# Altium PCB PCB_Source_IoT.PcbDoc (part 1 of 2)
Units mil, origin at the board's own origin, x right, y up, seen from the top; angles counter-clockwise.
Board outline 6000 x 4000 mil, 2 copper layers (Top Layer, Bottom Layer), stack 61.855 mil thick; 59 components, 29 nets, 125 pads, 0 vias.
Unrouted connection lines stored in the file: 95.
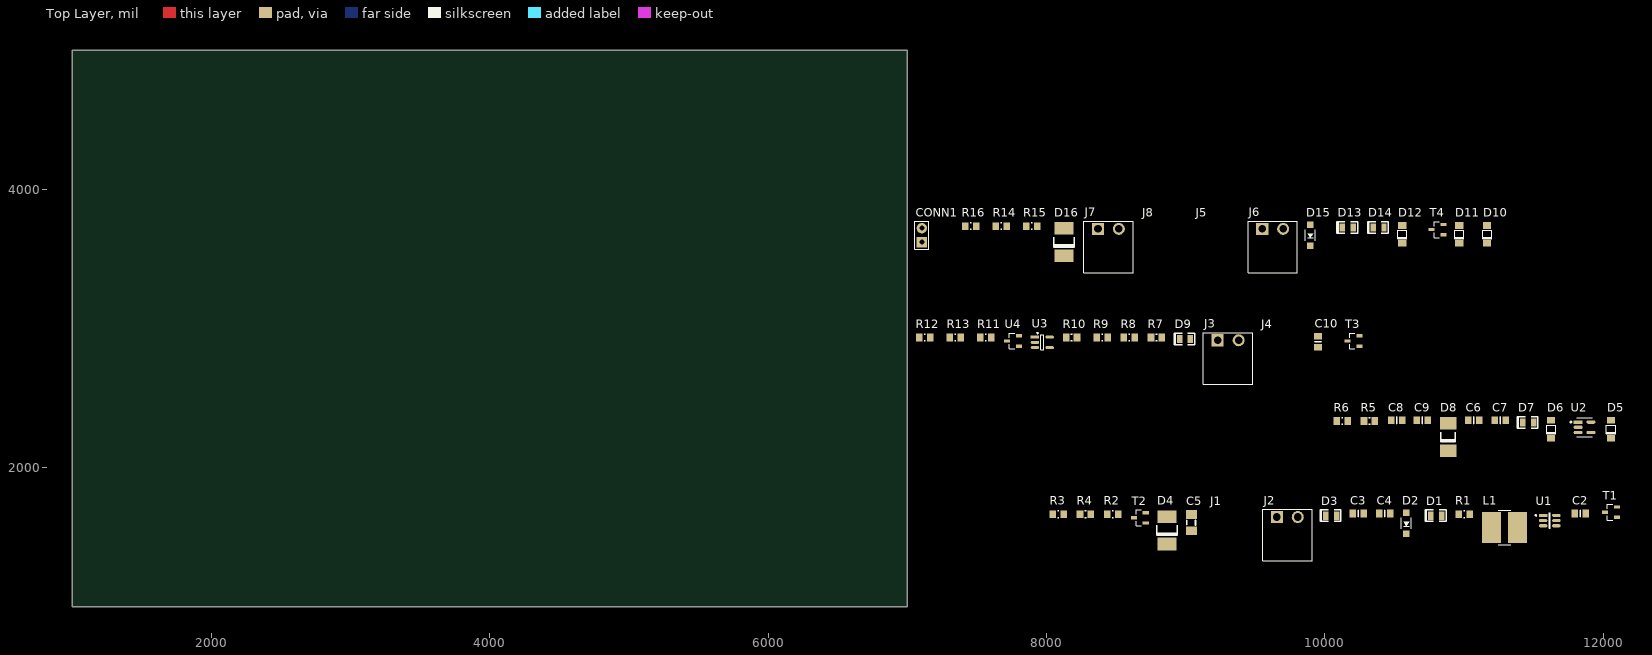
[diagram p0: Top Layer view]
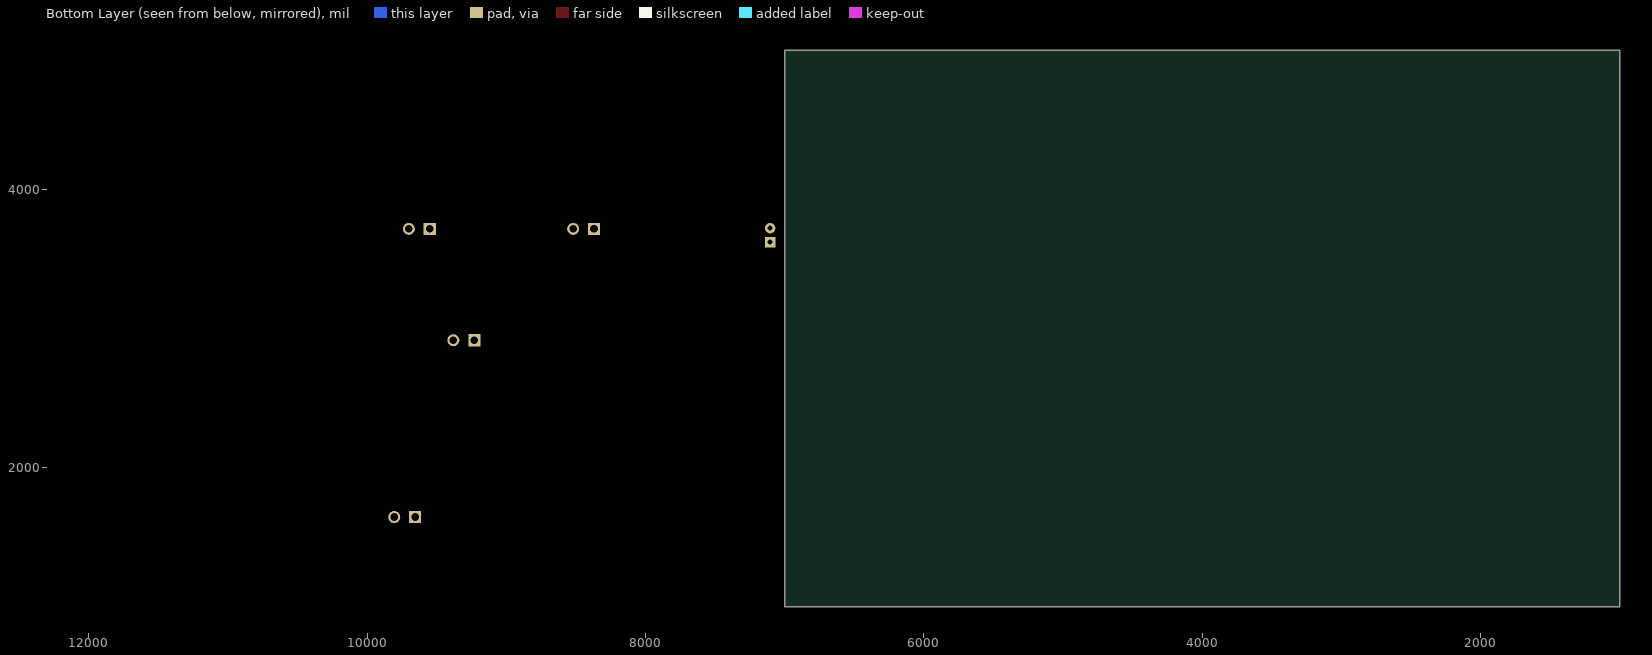
[diagram p1: Bottom Layer view, seen from below]

## Layer stack, top to bottom
Top Solder: solder mask 1, SM-003, Dk 4
Top Layer: signal copper 1.4
Dielectric 1: dielectric 59.0551, FR-4, Dk 4.8
Bottom Layer: signal copper 1.4
Bottom Solder: solder mask 1, SM-003, Dk 4

## Board outline
1000,1000 7000,1000 7000,5000 1000,5000

## Design rules (kind name [scope] priority, off if disabled: settings)
Clearance [All] p1: gap=10 ignorepadtopadclearanceinfootprint=FALSE
PolygonConnect [All] p1: connectstyle=Relief reliefconductorwidth=10 reliefentries=4 polygonreliefangle="90 Angle" airgapwidth=10
RoutingVias [All] p1: holewidth=28 width=50 viastyle="Through Hole" minholewidth=28 minwidth=50 maxholewidth=28 maxwidth=50
SolderMaskExpansion [All] p1: expansion=4 istentingtop=FALSE
SupplyNets "Schematic Supply Nets_7" [InNet('+3.7V')] p1: voltage=0.000
SupplyNets "Schematic Supply Nets_6" [InNet('VCC')] p2: voltage=0.000
SupplyNets "Schematic Supply Nets_5" [InNet('+5V_USB')] p3: voltage=0.000
SupplyNets "Schematic Supply Nets_4" [InNet('VBUS')] p4: voltage=0.000
SupplyNets "Schematic Supply Nets_3" [InNet('V_Battery')] p5: voltage=0.000
SupplyNets "Schematic Supply Nets_2" [InNet('VSYS')] p6: voltage=0.000
SupplyNets "Schematic Supply Nets_1" [InNet('GND')] p7: voltage=0.000
SupplyNets "Schematic Supply Nets" [InNet('+5V_Ext')] p8: voltage=0.000
Width [All] p1: maxlimit=10 minlimit=10 preferedwidth=10
30 further rules are at their usual default settings.

## Components (designator, comment, footprint, x,y, rotation, side; value= is the part's Value field where it differs from the comment)
C2 "CL21B104KACNNNC" C-0805 11835,1670 r0 top value=100nF
C3 "CL21A226MAYNNNE" C-0805 10240,1670 r0 top value=22uF
C4 "CL21A226MAYNNNE" C-0805 10430,1670 r0 top value=22uF
C5 "CL31A106KBHNNNE" C-1206 9040,1605 r90 top value=10uF
C6 "CL21B104KACNNNC" C-0805 11070,2340 r0 top value=100nF
C7 "C2012X5R1E475K125AB" C-0805 11260,2340 r0 top value=4.7uF
C8 "CL21B104KACNNNC" C-0805 10515,2340 r0 top value=100nF
C9 "C2012X5R1E475K125AB" C-0805 10700,2340 r0 top value=4.7uF
C10 "CL21B104KACNNNC" C-0805 9950,2905 r90 top value=100nF
CONN1 "TSW-101-07-G-D" HDR2X1 7105,3620 r90 top
D1 "LTST-C170GKT" 0805-LED-G 10800,1655 r0 top
D2 "MMSZ5245B-TP" SOD-123 10585,1600 r90 top
D3 "LTST-C170GKT" 0805-LED-G 10045,1655 r0 top
D4 "SMBJ28CAQ-13-F" DO-214AA 8865,1550 r90 top
D5 "MBR120VLSFT1G" SOD-123F 12055,2275 r90 top
D6 "MBR120VLSFT1G" SOD-123F 11625,2275 r90 top
D7 "LTST-C170GKT" 0805-LED-G 11460,2325 r0 top
D8 "SMAJ5.0A-13-F" DO-214AC 10885,2220 r90 top
D9 "LTST-C171TBKT" 0805-LED-B 8995,2925 r0 top
D10 "MBR120VLSFT1G" SOD-123F 11165,3675 r90 top
D11 "MBR120VLSFT1G" SOD-123F 10965,3675 r90 top
D12 "MBR120VLSFT1G" SOD-123F 10555,3675 r90 top
D13 "LTST-C170GKT" 0805-LED-G 10165,3725 r0 top
D14 "LTST-C170GKT" 0805-LED-G 10385,3725 r0 top
D15 "MMSZ5245B-TP" SOD-123 9895,3670 r90 top
D16 "SMBJ6.0CATR" DO-214AA 8125,3620 r90 top
J1 "5447861" 5447861 9170,1065 r0 top
J2 "5444262" 5444262 9655,1645 r0 top
J3 "5444262" 5444262 9230,2915 r0 top
J4 "5447861" 5447861 9535,2335 r0 top
J5 "5447861" 5447861 9065,3135 r0 top
J6 "5444262" 5444262 9550,3715 r0 top
J7 "5444262" 5444262 8370,3715 r0 top
J8 "5447861" 5447861 8680,3135 r0 top
L1 "1255AY-4R7M=P3" DG6045C 11290,1570 r0 top value=4.7uH
R1 "CRGCQ0805F100K" R-0805 11000,1665 r0 top value=100kR
R2 "CRGCQ0805J470R" R-0805 8475,1665 r0 top value=470R
R3 "RC0805FR-0710KL" R-0805 8085,1665 r0 top value=10kR
R4 "RC0805FR-071KL" R-0805 8280,1665 r0 top value=1kR
R5 "ERJ-6ENF2001V" R-0805 10320,2335 r0 top value=2kR
R6 "CRGCQ0805J470R" R-0805 10125,2335 r0 top value=470R
R7 "CRGCQ0805F100K" R-0805 8790,2935 r0 top value=100kR
R8 "RC0805FR-0710KL" R-0805 8595,2935 r0 top value=10kR
R9 "RC0805FR-071ML" R-0805 8400,2935 r0 top value=1MR
R10 "CRGCQ0805J470R" R-0805 8180,2935 r0 top value=470R
R11 "RC0805FR-07270KL" R-0805 7565,2935 r0 top value=270kR
R12 "RC0805FR-0716KL" R-0805 7125,2935 r0 top value=16kR
R13 "RC0805FR-13330KL" R-0805 7345,2935 r0 top value=330kR
R14 "CRGCQ0805J470R" R-0805 7675,3735 r0 top value=470R
R15 "CRGCQ0805J470R" R-0805 7895,3735 r0 top value=470R
R16 "RC0805FR-0710KL" R-0805 7455,3735 r0 top value=10kR
T1 "DMP4065S-7" SOT23-3 12055,1680 r0 top
T2 "DDTC143ZCA-7-F" SOT23-3 8670,1640 r0 top
T3 "PJA3415_R1_00001" SOT23-3 10205,2910 r0 top
T4 "DMP4065S-7" SOT23-3 10810,3710 r0 top
U1 "AP63205WU-7" TSOT-23-6_A 11615,1620 r0 top
U2 "MCP73831T-2ACI/OT" TSOT-23-5_A 11865,2290 r0 top
U3 "TLV7031QDBVRQ1" SOT-753 7970,2900 r0 top
U4 "LM4041DYM3-1.2-TR" SOT23-3 7760,2910 r0 top

## Footprints (in the part's own frame and the unit in brackets; to place one, negate y for a bottom-side part, rotate by r counter-clockwise, add the part's x,y. Pads: shape width x height; smd on the part's side, far side on the other; paste and mask are expansions set on the pad)
0805-LED-B [mm]
  rect 1x1.5 smd: 1(-1,0) 2(1,0)
  silkscreen extent -2.02,-1.05 1.78,1.05, body extent -1.01,-0.62 1.01,0.62, height 1.1
0805-LED-G [mm]
  rect 1x1.5 smd: 1(-1,0) 2(1,0)
  silkscreen extent -2.02,-1.05 1.78,1.05, body extent -1.01,-0.61 1.01,0.64, height 1.1
5444262 [mm]
  rect 2.2x2.2 hole 1.4: 1(0,0)
  round 2.2 hole 1.4: 2(3.81,0)
  silkscreen extent -2.6,-8 6.41,1.4, body extent -2.6,-7.95 6.41,1.35, height 7.25
5447861 [mil]
  body extent 0,0 331,634, height 303
C-0805 [mm]
  rect 1.2x1.4 smd: 1(-1,0) 2(1,0)
  silkscreen extent 0,-0.6 0,0.6, body extent -1,-0.63 1,0.63, height 0.81
C-1206 [mm]
  rect 1.6x2 smd: 1(-1.5,0) 2(1.5,0)
  silkscreen extent -0.42,-0.78 0.4,0.8, body extent -1.6,-0.8 1.6,0.8, height 1.16
DG6045C [mm]
  rect 3.5x5.7 smd: 1(-2.35,0) 2(2.35,0)
  silkscreen extent -1.17,-3.17 1.17,3.12, body extent -3,-3 3,3, height 4.5
DO-214AA [mm]
  rect 2.3x3.5 smd mask+0.1: 1(-2.5,0) 2(2.5,0)
  silkscreen extent -0.9,-2 0.9,2, body extent -2.79,-1.97 2.79,1.98, height 2.65
DO-214AC [mm]
  rect 2.3x3 smd mask+0.1: 1(-2.5,0) 2(2.5,0)
  silkscreen extent -0.9,-1.3 0.9,1.3, body extent -2.6,-1.3 2.6,1.3, height 2.4
HDR2X1 [mm]
  rect 1.9x1.9 hole 0.9: 1(0,0)
  round 1.9 hole 0.9: 2(2.54,0)
  silkscreen extent -1.27,-1.27 3.81,1.27, body extent -1.27,-1.27 3.81,1.27, height 8.38
R-0805 [mm]
  rect 1.2x1.4 smd: 1(-1,0) 2(1,0)
  silkscreen extent -0.1,-0.6 0.1,0.6, body extent -1.05,-0.67 1.05,0.68, height 0.6
SOD-123 [mm] "On Semi recommended land pattern"
  rect 1.2x1.22 smd: 1(-1.905,0) 2(1.905,0)
  silkscreen extent -1.02,-0.89 1.02,0.89, body extent -1.93,-0.9 1.93,0.9, height 1.35
SOD-123F [mm]
  rect 1.2x1.5 smd: 1(-1.635,0) 2(1.635,0)
  silkscreen extent -0.78,-0.82 0.78,0.82, body extent -1.9,-0.9 1.9,0.9, height 1.02
SOT23-3 [mm]
  rect 1.1x0.6 smd: 1(1.092,-0.94) 2(1.092,0.94) 3(-1.092,0)
  silkscreen extent -0.66,-1.45 0.28,1.45, body extent -1.18,-1.46 1.19,1.46, height 1.12
SOT-753 [mm]
  rect 1.54x0.566 smd: 1(-1.341,0.95)
  rrect100% 1.54x0.566 smd: 2(-1.341,0) 3(-1.341,-0.95) 4(1.341,-0.95) 5(1.341,0.95)
  silkscreen extent -0.97,-1.38 0.28,1.77, body extent -1.5,-1.47 1.5,1.53, height 1.46
TSOT-23-5_A [mil]
  rect 64.5x24.33 smd paste+0 mask+0: 1(-45.91,37.4)
  rrect100% 64.5x24.33 smd paste+0 mask+0: 2(-45.91,0) 3(-45.91,-37.4) 4(45.91,-37.4) 5(45.91,37.4)
  silkscreen extent -103,-67 55,67, body extent -53,-57 53,57, height 57
TSOT-23-6_A [mm]
  rect 1.54x0.566 smd paste+0 mask+0: 1(-1.216,0.95)
  rrect100% 1.54x0.566 smd paste+0 mask+0: 2(-1.216,0) 3(-1.216,-0.95) 4(1.216,-0.95) 5(1.216,0) 6(1.216,0.95)
  silkscreen extent -2.67,-1.45 0.05,1.45, body extent -2.49,-1.95 2.49,1.95, height 0.25

## Part data
C2 C6 C8 C10: "CAP CER 0.1UF 25V X7R 0805", Case Code (Imperial)=0805, Case Code (Metric)=2012, Dielectric=X7R, Manufacturer=Samsung, Max Operating Temperature=125°C, Min Operating Temperature=-55°C, Package Quantity=1, Supplier Part Number=1276-1099-6-ND, Supplier Part Number 1=1276-1099-1-ND, Tolerance=10%, Voltage=25V, Case/Package=0805, Category="Ceramic Capacitors", ComponentLink1Description=https://datasheet.ciiva.com/25801/cl21b104kacnnnc-25801824.pdf?src-supplier=Digikey, ComponentLink1URL=https://datasheet.ciiva.com/25801/cl21b104kacnnnc-25801824.pdf?src-supplier=Digikey, ComponentLink2Description=https://datasheet.ciiva.com/15216/getdatasheetpartid-355204-15216236.pdf?src-supplier=Verical, ComponentLink2URL=https://datasheet.ciiva.com/15216/getdatasheetpartid-355204-15216236.pdf?src-supplier=Verical, Construction=Flat, Depth=1.25mm, Height=0.85mm, Length=2mm, Manufacturer Part Number=CL21B104KACNNNC, Material=Ceramic, Mounting Technology="Surface Mount", Packaging="Tape and Reel", Pricing="1=0,1, 10=0,031, 50=0,0208, 100=0,0178, 500=0,01262, 1000=0,01102 (USD)", Radiation Hardening=No, RoHS=Yes, RoHS Compliant=Yes, Series=CL, Stock=257719, Supplier=Digikey, Supplier 1=Digikey, Supplier 2=Mouser, Supplier Part Number 2=187-CL21B104KACNNNC, Thickness=0.037inch, Voltage Rating=25V, Voltage Rating (DC)=25V, Width=0.049inch
C3 C4: "CAP CER 22UF 25V X5R 0805", Case/Package=0805, Dielectric=X5R, Manufacturer=Samsung, Max Operating Temperature=85°C, Min Operating Temperature=-55°C, Supplier Part Number=1276-CL21A226MAYNNNECT-ND, Supplier Part Number 1=187-CL21A226MAYNNNE, Tolerance=20%, Voltage Rating=25V, Category="Ceramic Capacitors", ComponentLink1Description=https://datasheet.octopart.com/CL21A226MAYNNNE-Samsung-Electro-Mechanics-datasheet-149154243.pdf?src-supplier=Future+Electronics, ComponentLink1URL=https://datasheet.octopart.com/CL21A226MAYNNNE-Samsung-Electro-Mechanics-datasheet-149154243.pdf?src-supplier=Future+Electronics, ComponentLink2Description=https://datasheet.octopart.com/CL21A226MAYNNNE-Samsung-datasheet-8326407.pdf?src-supplier=TME, ComponentLink2URL=https://datasheet.octopart.com/CL21A226MAYNNNE-Samsung-datasheet-8326407.pdf?src-supplier=TME, Height=1.45mm, Manufacturer Part Number=CL21A226MAYNNNE, Material=Ceramic, Pricing="1=0,26, 10=0,147, 50=0,1048, 100=0,0917, 500=0,06924, 1000=0,06226 (USD)", RoHS=Yes, RoHS Compliant=Yes, Stock=259465, Supplier=Digikey, Supplier 1=Mouser, Supplier 2=Digikey, Supplier Part Number 2=1276-CL21A226MAYNNNECT-ND, Voltage Rating (DC)=25V
C5: "CAP CER 10UF 50V X5R 1206", Case Code (Imperial)=1206, Case Code (Metric)=3216, Dielectric=X5R, Manufacturer=Samsung, Max Operating Temperature=85°C, Min Operating Temperature=-55°C, Package Quantity=1, Supplier Part Number=1276-2876-1-ND, Supplier Part Number 1=187-CL31A106KBHNNNE, Tolerance=10%, Voltage Rating=50V, Case/Package=1206, Category="Ceramic Capacitors", ComponentLink1Description=https://datasheet.ciiva.com/25726/cl31a106kbhnnne-25726404.pdf?src-supplier=Digikey, ComponentLink1URL=https://datasheet.ciiva.com/25726/cl31a106kbhnnne-25726404.pdf?src-supplier=Digikey, ComponentLink2Description=https://datasheet.ciiva.com/15216/getdatasheetpartid-353196-15216238.pdf?src-supplier=Verical, ComponentLink2URL=https://datasheet.ciiva.com/15216/getdatasheetpartid-353196-15216238.pdf?src-supplier=Verical, ComponentLink3Description=https://datasheet.ciiva.com/29201/452492-da-01-en-vs-kondensator-1206-29201107.pdf?src-supplier=Conrad, ComponentLink3URL=https://datasheet.ciiva.com/29201/452492-da-01-en-vs-kondensator-1206-29201107.pdf?src-supplier=Conrad, ComponentLink4Description=https://datasheet.ciiva.com/16437/cl05b104kq5nnnc-16437222.pdf?src-supplier=Future+Electronics, ComponentLink4URL=https://datasheet.ciiva.com/16437/cl05b104kq5nnnc-16437222.pdf?src-supplier=Future+Electronics, Construction=Flat, Depth=1.6mm, Height=1.6mm, Lead Free="Lead Free", Length=3.2mm, Manufacturer Part Number=CL31A106KBHNNNE, Material=Ceramic, Mounting Technology="Surface Mount", Packaging="Tape and Reel", Pricing="1=0,36, 10=0,212, 50=0,153, 100=0,1346, 500=0,1033, 1000=0,09353, 2000=0,08546, 4000=0,07877, 6000=0,07541, 10000=0,07167, 14000=0,06947, 20000=0,06735, 50000=0,06277, 100000=0,05998 (USD)", Radiation Hardening=No, RoHS=Yes, RoHS Compliant=Yes, Series=CL, Stock=1122963, Supplier=Digikey, Supplier 1=Mouser, Supplier 2=DigiKey, Supplier Part Number 2=1276-2876-1-ND, Thickness=0.071inch, Voltage Rating (DC)=50V, Width=0.063inch
C7 C9: "CAP CER 4.7UF 25V X5R 0805", Case Code (Imperial)=0805, Case Code (Metric)=2012, Dielectric=X5R, Dielectric Material=Ceramic, Manufacturer=TDK, Max Operating Temperature=85°C, Min Operating Temperature=-55°C, Package Quantity=2000, Supplier Part Number=445-4116-1-ND, Supplier Part Number 1=810-C2012X5R1E475K, Tolerance=10%, Voltage=25V, Case/Package=0805, Category="Ceramic Capacitors", ComponentLink1Description=https://datasheet.ciiva.com/24216/tdkmlcccaprange-24216480.pdf?src-supplier=Mouser, ComponentLink1URL=https://datasheet.ciiva.com/24216/tdkmlcccaprange-24216480.pdf?src-supplier=Mouser, ComponentLink2Description=https://datasheet.ciiva.com/11788/0900766b80c1bb00-11788107.pdf?src-supplier=Rs, ComponentLink2URL=https://datasheet.ciiva.com/11788/0900766b80c1bb00-11788107.pdf?src-supplier=Rs, ComponentLink3Description=https://datasheet.ciiva.com/6251/tdkmlcccaprange-6251817.pdf?src-supplier=Digikey, ComponentLink3URL=https://datasheet.ciiva.com/6251/tdkmlcccaprange-6251817.pdf?src-supplier=Digikey, ComponentLink4Description=https://datasheet.ciiva.com/6251/tdkmlcccaprange-6251820.pdf?src-supplier=Digikey, ComponentLink4URL=https://datasheet.ciiva.com/6251/tdkmlcccaprange-6251820.pdf?src-supplier=Digikey, ComponentLink5Description=https://datasheet.ciiva.com/6251/tdkmlcccaprange-6251823.pdf?src-supplier=Digikey, ComponentLink5URL=https://datasheet.ciiva.com/6251/tdkmlcccaprange-6251823.pdf?src-supplier=Digikey, ComponentLink6Description=https://datasheet.ciiva.com/28602/1744655-28602173.pdf?src-supplier=Element14, ComponentLink6URL=https://datasheet.ciiva.com/28602/1744655-28602173.pdf?src-supplier=Element14, ComponentLink7Description=https://datasheet.ciiva.com/36857/1796654-36857301.pdf?src-supplier=Element14, ComponentLink7URL=https://datasheet.ciiva.com/36857/1796654-36857301.pdf?src-supplier=Element14, ComponentLink8Description=https://datasheet.ciiva.com/16449/e412-c-16449599.pdf?src-supplier=Future+Electronics, ComponentLink8URL=https://datasheet.ciiva.com/16449/e412-c-16449599.pdf?src-supplier=Future+Electronics, Construction=Flat, Depth=1.25mm, Height=1.25mm, Lead Free="Lead Free", Length=2mm, Manufacturer Part Number=C2012X5R1E475K125AB, Material=Ceramic, Mounting Technology="Surface Mount", Packaging="Tape and Reel", Pins=2, Pricing="1=0,27, 10=0,158, 50=0,1126, 100=0,0984, 500=0,07452, 1000=0,06706 (USD)", Reach SVHC Compliant=No, RoHS=Yes, RoHS Compliant=Yes, Series=C, Stock=2075676, Supplier=Digikey, Supplier 1=Mouser, Supplier 2=Digikey, Supplier Part Number 2=445-4116-1-ND, Termination=SMD/SMT, Voltage Rating=25V, Voltage Rating (DC)=25V, Weight=0.000194oz, Width=1.25mm
CONN1: "CONN HEADER VERT 2POS", Flammability Rating="UL94 V-0", Housing Color=Black, Manufacturer=Samtec, Max Current Rating=7.6A, Max Operating Temperature=125°C, Max Voltage Rating (AC)=550V, Min Operating Temperature=-55°C, Supplier Part Number=SAM1028-01-ND, Supplier Part Number 1=200-TSW10107GD, Category=Connectors, ComponentLink1Description=https://datasheet.ciiva.com/6861/tsw-xxx-xx-xxx-x-xx-xxx-mkt-6861372.pdf?src-supplier=Digikey, ComponentLink1URL=https://datasheet.ciiva.com/6861/tsw-xxx-xx-xxx-x-xx-xxx-mkt-6861372.pdf?src-supplier=Digikey, ComponentLink2Description=https://datasheet.ciiva.com/48561/htsw-th-48561486.pdf?src-supplier=Avnet, ComponentLink2URL=https://datasheet.ciiva.com/48561/htsw-th-48561486.pdf?src-supplier=Avnet, Connector Type=Header, Contact Finish - Mating=GOLD, Contact Material=Bronze, Contact Plating=Gold, Contact Shape=Square, Contact Type="Male Pin", Depth=5.08mm, Fastening Type=Pull, Gender=Male, Housing Material=Polyester, Insulation Color=Black, Insulation Material=PBT, Lead Free="Lead Free", Length=2.54mm, Manufacturer Part Number=TSW-101-07-G-D, Mounting Technology="Through Hole", Number of Contacts=2, Number of Positions=2, Number of Rows=2, Orientation=Straight, Packaging=Bulk, Pricing="1=0,41, 10=0,313, 100=0,2379, 500=0,19828, 1000=0,18386, 5000=0,15555, 10000=0,14532 (USD)", Reach SVHC Compliant=No, RoHS=Yes, RoHS Compliant=Yes, Series=TSW, Stock=1970, Supplier=Digikey, Supplier 1=Mouser, Supplier 2=Digikey, Supplier Part Number 2=SAM1028-01-ND, Termination=Solder, Width=5.08mm
D1 D3 D7 D13 D14: "LED GREEN CLEAR SMD", Case Code (Imperial)=0805, Case Code (Metric)=2012, Color=Green, Forward Current=30mA, Forward Voltage=2.1V, JLCPCB Part=C125090, Lens Color=Colorless, Manufacturer="Vishay Lite-On", Max Operating Temperature=85°C, Min Operating Temperature=-55°C, Package Quantity=1, Power Dissipation=100mW, Reverse Voltage=5V, Supplier Part Number 1=160-1179-1-ND, Test Current=10mA, Case/Package=0805, Category=LEDs, ComponentLink1Description=https://datasheet.ciiva.com/2110/ltst-c170gkt-2110128.pdf?src-supplier=Digi-Key, ComponentLink1URL=https://datasheet.ciiva.com/2110/ltst-c170gkt-2110128.pdf?src-supplier=Digi-Key, ComponentLink2Description=https://datasheet.ciiva.com/11773/0900766b80dc0278-11773630.pdf?src-supplier=RSComponents, ComponentLink2URL=https://datasheet.ciiva.com/11773/0900766b80dc0278-11773630.pdf?src-supplier=RSComponents, ComponentLink3Description=https://datasheet.ciiva.com/12400/lite-on-ltst-c170gkt-187191-12400783.pdf?src-supplier=Mouser, ComponentLink3URL=https://datasheet.ciiva.com/12400/lite-on-ltst-c170gkt-187191-12400783.pdf?src-supplier=Mouser, ComponentLink4Description=https://datasheet.ciiva.com/15117/getdatasheetpartid-142079-15117738.pdf?src-supplier=Verical, ComponentLink4URL=https://datasheet.ciiva.com/15117/getdatasheetpartid-142079-15117738.pdf?src-supplier=Verical, ComponentLink5Description=https://datasheet.ciiva.com/25772/ltst-c170gkt-25772881.pdf?src-supplier=Allied+Electronics, ComponentLink5URL=https://datasheet.ciiva.com/25772/ltst-c170gkt-25772881.pdf?src-supplier=Allied+Electronics, ComponentLink6Description=https://datasheet.ciiva.com/16387/ltst-c170gkt-16387357.pdf?src-supplier=Future+Electronics, ComponentLink6URL=https://datasheet.ciiva.com/16387/ltst-c170gkt-16387357.pdf?src-supplier=Future+Electronics, Depth=1.25mm, Dominant Wavelength=569nm, Height=1.1mm, Illumination Color=Green, Lead Free="Lead Free", Length=2mm, Lens Style=Diffused,Colorless,Rectangular, Lens Transparency=Clear, Luminous Intensity=6mcd, Manufacturer Part Number=LTST-C170GKT, Mount="Surface Mount", Number of Elements=1, Number of LEDs=1, Number of Pins=2, Packaging="Tape and Reel", Power Rating=100mW, Pricing 1="1=0,30000, 10=0,16000, 100=0,07440, 500=0,06870, 1000=0,05382 (USD)", Radiation Hardening=No, RoHS=Yes, RoHS Compliant=Yes, Series="CHIPLED 0805", Stock 1=753504, Supplier 1=Digi-Key, Supplier 2=Mouser, Supplier Part Number 2=859-LTST-C170GKT, Viewing Angle=130°, Voltage=5V, Wavelength=565nm, Width=1.25mm
D2 D15: "DIODE ZENER 15V 500MW SOD123", Manufacturer=MCC, Max Operating Temperature=150°C, Max Power Dissipation=500mW, Max Reverse Leakage Current=100nA, Min Operating Temperature=-55°C, Package Quantity=1, Supplier Part Number 1=MMSZ5245B-TPMSCT-ND, Test Current=8.5mA, Tolerance=5%, Zener Voltage=15V, Category="Zener Diodes", ComponentLink1Description=https://datasheet.ciiva.com/890/mmsz5221-mmsz5259sod123-890445.pdf?src-supplier=Digi-Key, ComponentLink1URL=https://datasheet.ciiva.com/890/mmsz5221-mmsz5259sod123-890445.pdf?src-supplier=Digi-Key, ComponentLink2Description=https://datasheet.ciiva.com/890/mmsz5221-mmsz5259sod123-890446.pdf?src-supplier=Digi-Key, ComponentLink2URL=https://datasheet.ciiva.com/890/mmsz5221-mmsz5259sod123-890446.pdf?src-supplier=Digi-Key, ComponentLink3Description=https://datasheet.ciiva.com/890/mmsz5221-mmsz5259sod123-890447.pdf?src-supplier=Digi-Key, ComponentLink3URL=https://datasheet.ciiva.com/890/mmsz5221-mmsz5259sod123-890447.pdf?src-supplier=Digi-Key, Element Configuration=Single, Impedance=16R, Lead Free="Lead Free", Manufacturer Part Number=MMSZ5245B-TP, Mount="Surface Mount", Number of Pins=2, Packaging="Tape and Reel", Power Dissipation=500mW, Pricing 1="1=0,22000, 10=0,17700, 100=0,09400, 500=0,06188, 1000=0,04208 (USD)", RoHS=Yes, Series=-, Stock 1=330368, Supplier 1=Digi-Key, Supplier 2=Mouser, Supplier 3="Arrow Electronics", Supplier Part Number 2=833-MMSZ5245B-TP, Supplier Part Number 3=MMSZ5245B-TP, Voltage Tolerance=5%
D4: "TVS DIODE 28VWM 45.4VC SMB", Case/Package=SMB, Clamping Voltage=45.4V, Manufacturer=Diodes, Max Operating Temperature=150°C, Min Breakdown Voltage=31.1V, Min Operating Temperature=-55°C, Peak Pulse Current=13.2A, Peak Pulse Power=600W, Power Line Protection=No, Resistor Type=Zener, Reverse Standoff Voltage=28V, Supplier Part Number 1=SMBJ28CAQ-13-FDICT-ND, Category="TVS Diodes", ComponentLink1Description=https://www.diodes.com/assets/Datasheets/ds40740.pdf?src-supplier=Digi-Key, ComponentLink1URL=https://www.diodes.com/assets/Datasheets/ds40740.pdf?src-supplier=Digi-Key, Manufacturer Part Number=SMBJ28CAQ-13-F, Mount="Surface Mount", Number of Bidirectional Channels=1, Packaging="Tape and Reel", Pricing 1="1=0,44000, 10=0,37900, 100=0,28310, 500=0,22240, 1000=0,17185 (USD)", RoHS=Yes, RoHS Compliant=Yes, Stock 1=16278, Supplier 1=Digi-Key, Supplier 2=Mouser, Supplier Part Number 2=621-SMBJ28CAQ-13-F
D5 D6 D10 D11 D12: "DIODE SCHOTTKY 20V 1A SOD123FL", Average Rectified Current=1A, Forward Voltage=340mV, Manufacturer="ON Semiconductor", Max Forward Surge Current (Ifsm)=45A, Max Operating Temperature=125°C, Max Repetitive Reverse Voltage (Vrrm)=20V, Max Reverse Current=600uA, Min Operating Temperature=-65°C, Package Quantity=3000, Supplier Part Number=MBR120VLSFT1GOSCT-ND, Category="Schottky Diodes", ComponentLink1Description=https://datasheet.ciiva.com/7962/85900-7962720.pdf?src-supplier=Element14, ComponentLink1URL=https://datasheet.ciiva.com/7962/85900-7962720.pdf?src-supplier=Element14, ComponentLink2Description=https://datasheet.ciiva.com/915/mbr120vlsft1-d-915659.pdf?src-supplier=Digikey, ComponentLink2URL=https://datasheet.ciiva.com/915/mbr120vlsft1-d-915659.pdf?src-supplier=Digikey, ComponentLink3Description=https://datasheet.ciiva.com/915/mbr120vlsft1-d-915660.pdf?src-supplier=Digikey, ComponentLink3URL=https://datasheet.ciiva.com/915/mbr120vlsft1-d-915660.pdf?src-supplier=Digikey, ComponentLink4Description=https://datasheet.ciiva.com/18435/70100467-18435526.pdf?src-supplier=Allied+Electronics, ComponentLink4URL=https://datasheet.ciiva.com/18435/70100467-18435526.pdf?src-supplier=Allied+Electronics, ComponentLink5Description=https://datasheet.ciiva.com/16392/mbr120vlsft1-d-16392906.pdf?src-supplier=Future+Electronics, ComponentLink5URL=https://datasheet.ciiva.com/16392/mbr120vlsft1-d-16392906.pdf?src-supplier=Future+Electronics, Current Rating=1A, Element Configuration=Single, Forward Current=1A, Halogen Free="Halogen Free", Height=0.035inch, Lead Free="Lead Free", Length=0.114inch, Manufacturer Part Number=MBR120VLSFT1G, Max Reverse Leakage Current=600uA, Max Reverse Voltage (DC)=20V, Max Surge Current=45A, Output Current=1A, Packaging="Tape and Reel", Peak Non-Repetitive Surge Current=45A, Pins=2, Polarity=Standard, Pricing="1=0,56, 10=0,348, 100=0,2217, 500=0,16708, 1000=0,14944 (USD)", Radiation Hardening=No, Reach SVHC Compliant=No, RoHS=Yes, RoHS Compliant=Yes, Series=-, Stock=20847, Supplier=Digikey, Supplier 1=Digikey, Supplier 2=Mouser, Supplier Part Number 1=MBR120VLSFT1GOSCT-ND, Supplier Part Number 2=863-MBR120VLSFT1G, Voltage Rating (DC)=20V, Width=0.071inch
D8: "TVS DIODE 5VWM 9.2VC SMA", Breakdown Voltage=6.4V, Capacitance=2nF, Case/Package=SMA, Clamping Voltage=9.2V, Forward Voltage=3.5V, JLCPCB Part=C87074, Leakage Current=800uA, Manufacturer=Diodes, Max Breakdown Voltage=7.25V, Max Operating Temperature=150°C, Max Output Current=43.5A, Max Power Dissipation=400W, Max Surge Current=40A, Min Operating Temperature=-55°C, Package Quantity=5000, Power Line Protection=No, Resistor Type=Zener, Reverse Standoff Voltage=5V, Supplier Part Number 1=SMAJ5.0A-FDICT-ND, Test Current=10mA, Category="TVS Diodes", Clamping Voltage-Max=9.2V, ComponentLink1Description=https://datasheet.ciiva.com/27052/1542127-27052431.pdf?src-supplier=Jameco, ComponentLink1URL=https://datasheet.ciiva.com/27052/1542127-27052431.pdf?src-supplier=Jameco, ComponentLink2Description=https://datasheet.ciiva.com/22696/1670961-22696859.pdf?src-supplier=Element14, ComponentLink2URL=https://datasheet.ciiva.com/22696/1670961-22696859.pdf?src-supplier=Element14, ComponentLink3Description=https://datasheet.ciiva.com/26933/getdatasheetpartid-35116-26933158.pdf?src-supplier=Verical, ComponentLink3URL=https://datasheet.ciiva.com/26933/getdatasheetpartid-35116-26933158.pdf?src-supplier=Verical, Contact Plating=Tin,Matte, Diode Type=ZENER, Direction=Unidirectional, Element Configuration=Single, ESD Protection=No, Height=2.1mm, Lead Free="Lead Free", Length=4.6mm, Manufacturer Part Number=SMAJ5.0A-13-F, Max Reverse Leakage Current=800uA, Min Breakdown Voltage=6.4V, Mount="Surface Mount", Number of Elements=1, Number of Pins=2, Number of Unidirectional Channels=1, Packaging="Tape and Reel", Peak Pulse Current=43.5A, Peak Pulse Power=400W, Polarity=Unidirectional, Power Dissipation=400W, Pricing 1="1=0,42000, 10=0,31700, 100=0,19770, 500=0,13528, 1000=0,10406, 2000=0,09366 (USD)", Radiation Hardening=No, REACH SVHC="No SVHC", Reverse Breakdown Voltage=6.4V, RoHS=Yes, RoHS Compliant=Yes, Series=-, Stock 1=435542, Supplier 1=Digi-Key, Supplier 2=Mouser, Supplier 3="Arrow Electronics", Supplier 4=Digi-Key, Supplier 5=Mouser, Supplier 6=Digi-Key, Supplier 7=Mouser, Supplier Part Number 2=621-SMAJ5.0A-13-F, Supplier Part Number 3=SMAJ5.0A-13-F, Supplier Part Number 4=SMAJ5.0A-E3/61GICT-ND, Supplier Part Number 5=625-SMAJ5.0A-E3, Supplier Part Number 6=F11528CT-ND, Supplier Part Number 7=863-SZ1SMA5.0AT3G, Termination=SMD/SMT, Voltage Rating (DC)=5V, Width=2.92mm, Working Voltage=5V
D9: "LED BLUE CLEAR CHIP SMD", Case Code (Imperial)=0805, Case Code (Metric)=2012, Color=Blue, Forward Current=20mA, Forward Voltage=3.8V, JLCPCB Part=C98225, Lens Color=Colorless, Manufacturer="Vishay Lite-On", Max Operating Temperature=80°C, Min Operating Temperature=-20°C, Package Quantity=1, Power Dissipation=76mW, Reverse Voltage=5V, Supplier Part Number 1=160-1645-1-ND, Case/Package=0805, Category=LEDs, ComponentLink1Description=https://datasheet.ciiva.com/2110/ltst-c171tbkt-2110304.pdf?src-supplier=Digi-Key, ComponentLink1URL=https://datasheet.ciiva.com/2110/ltst-c171tbkt-2110304.pdf?src-supplier=Digi-Key, ComponentLink2Description=https://datasheet.ciiva.com/11774/0900766b80dc029b-11774836.pdf?src-supplier=RSComponents, ComponentLink2URL=https://datasheet.ciiva.com/11774/0900766b80dc029b-11774836.pdf?src-supplier=RSComponents, ComponentLink3Description=https://datasheet.ciiva.com/12403/lite-on-ltst-c171tbkt-187246-12403800.pdf?src-supplier=Mouser, ComponentLink3URL=https://datasheet.ciiva.com/12403/lite-on-ltst-c171tbkt-187246-12403800.pdf?src-supplier=Mouser, ComponentLink4Description=https://datasheet.ciiva.com/15118/getdatasheetpartid-225754-15118121.pdf?src-supplier=Verical, ComponentLink4URL=https://datasheet.ciiva.com/15118/getdatasheetpartid-225754-15118121.pdf?src-supplier=Verical, ComponentLink5Description=https://datasheet.ciiva.com/2110/s-110-ltst-c171tbkt0630-2110305.pdf?src-supplier=Digi-Key, ComponentLink5URL=https://datasheet.ciiva.com/2110/s-110-ltst-c171tbkt0630-2110305.pdf?src-supplier=Digi-Key, ComponentLink6Description=https://datasheet.ciiva.com/16444/lite-onltst-c171tbkt-16444780.pdf?src-supplier=Future+Electronics, ComponentLink6URL=https://datasheet.ciiva.com/16444/lite-onltst-c171tbkt-16444780.pdf?src-supplier=Future+Electronics, Depth=1.25mm, Dominant Wavelength=475nm, Height=0.8mm, Illumination Color=Blue, Lead Free="Lead Free", Length=2mm, Lens Style=Diffused,Colorless,Rectangular,Clear, Lens Transparency=Clear, Luminous Intensity=180mcd, Manufacturer Part Number=LTST-C171TBKT, Mount="Surface Mount", Number of Elements=1, Number of LEDs=1, Number of Pins=2, Packaging="Tape and Reel", Pricing 1="1=0,32000, 10=0,25100, 100=0,11280, 500=0,10192, 1000=0,08372 (USD)", Radiation Hardening=No, RoHS=Yes, RoHS Compliant=Yes, Series="CHIPLED 0805", Stock 1=433320, Supplier 1=Digikey, Supplier 2=Mouser, Supplier Part Number 2=859-LTST-C171TBKT, Test Current=20mA, Viewing Angle=130°, Wavelength=468nm, Width=1.25mm
D16: library part SMBJ6.0CA-TR, "TVS DIODE 6VWM 10.3VC SMB", Breakdown Voltage=6.7V, Capacitance=3.85nF, Case/Package=DO-214AA, Clamping Voltage=13.7V, Leakage Current=20uA, Manufacturer=STMicroelectronics, Max Breakdown Voltage=7.05V, Max Operating Temperature=150°C, Max Surge Current=10mA, Min Operating Temperature=-55°C, Operating Supply Voltage=6V, Package Quantity=1, Peak Pulse Current=290A, Peak Pulse Power=600W, Power Line Protection=No, Resistor Type=Zener, Supplier Part Number 1=497-7454-1-ND, Category=Diodes, Clamping Voltage-Max=13.7V, ComponentLink1Description=https://datasheet.ciiva.com/15143/getdatasheetpartid-64868-15143186.pdf?src-supplier=Verical, ComponentLink1URL=https://datasheet.ciiva.com/15143/getdatasheetpartid-64868-15143186.pdf?src-supplier=Verical, ComponentLink2Description=https://datasheet.ciiva.com/7973/1761316-7973591.pdf?src-supplier=Element14, ComponentLink2URL=https://datasheet.ciiva.com/7973/1761316-7973591.pdf?src-supplier=Element14, ComponentLink3Description=https://datasheet.ciiva.com/337/cd00001366-337980.pdf?src-supplier=Digi-Key, ComponentLink3URL=https://datasheet.ciiva.com/337/cd00001366-337980.pdf?src-supplier=Digi-Key, ComponentLink4Description=https://datasheet.ciiva.com/337/cd00001366-337979.pdf?src-supplier=Digi-Key, ComponentLink4URL=https://datasheet.ciiva.com/337/cd00001366-337979.pdf?src-supplier=Digi-Key, ComponentLink5Description=https://datasheet.ciiva.com/337/cd00001366-337981.pdf?src-supplier=Digi-Key, ComponentLink5URL=https://datasheet.ciiva.com/337/cd00001366-337981.pdf?src-supplier=Digi-Key, ComponentLink6Description=https://datasheet.ciiva.com/7973/1761316-7973594.pdf?src-supplier=Element14, ComponentLink6URL=https://datasheet.ciiva.com/7973/1761316-7973594.pdf?src-supplier=Element14, ComponentLink7Description=https://datasheet.ciiva.com/41443/001184246-da-01-en-transil-600w-6-smbj6-0ca-tr-do-214aa-stm-41443708.pdf?src-supplier=Conrad, ComponentLink7URL=https://datasheet.ciiva.com/41443/001184246-da-01-en-transil-600w-6-smbj6-0ca-tr-do-214aa-stm-41443708.pdf?src-supplier=Conrad, Diode Type=ZENER, Direction=Bidirectional, Element Configuration=Single, Height=2.45mm, Lead Free="Lead Free", Length=4.6mm, Manufacturer Part Number=SMBJ6.0CA-TR, Max Reverse Leakage Current=20uA, Min Breakdown Voltage=6.7V, Mount="Surface Mount", Number of Bidirectional Channels=1, Number of Elements=1, Number of Pins=2, Packaging="Tape and Reel", Polarity=Bidirectional, Power Dissipation=600W, Pricing 1="1=0,44000, 10=0,35800, 100=0,24390, 500=0,18296, 1000=0,13721 (USD)", Radiation Hardening=No, REACH SVHC="No SVHC", Reverse Breakdown Voltage=6.7V, Reverse Standoff Voltage=6V, RoHS=Yes, RoHS Compliant=Yes, Series="SMBJ, TRANSIL™", Stock 1=1863, Supplier 1=Digi-Key, Supplier 2=Mouser, Supplier 3="Arrow Electronics", Supplier Part Number 2=511-SMBJ6.0CA-TR, Supplier Part Number 3=SMBJ6.0CA-TR, Test Current=10mA, Voltage Rating (DC)=6V, Width=3.95mm
J1 J4 J5 J8: "TERM BLOCK PLUG 2POS STR 3.81MM", Color=Green, Current=8A, Flammability Rating="UL94 V-0", Manufacturer="Phoenix Contact", Package Quantity=100, Supplier Part Number 1=277-11343-ND, Voltage=300V, Voltage Rating=160V, Category="Terminal Blocks", ComponentLink1Description=https://datasheet.ciiva.com/29706/5447861-29706032.pdf?src-supplier=Digi-Key, ComponentLink1URL=https://datasheet.ciiva.com/29706/5447861-29706032.pdf?src-supplier=Digi-Key, Connector Type=Screw, Contact Plating=Tin, Current Rating=8A, Housing Material=Polyamide, Manufacturer Part Number=5447861, Mount="Free Hanging", Number of Levels=1, Number of Pins=2, Number of Positions=2, Number of Positions Per Level=2, Packaging=Bulk, Pitch=0.15inch, Pricing 1="1=2,56000, 10=2,45300, 50=2,38620, 100=2,23000, 250=2,05160, 500=1,89550, 1000=1,80631, 2500=1,77954 (USD)", RoHS=Yes, Stock 1=30203, Supplier 1=Digi-Key, Supplier 2=Mouser, Supplier Part Number 2=651-5447861, Termination=Screw, Wire Gauge (Max)=30AWG, Wire Gauge (Min)=14AWG
J2 J3 J6 J7: "TERM BLOCK HDR 2POS 90DEG 3.81MM", Color=Green, Current=8A, Flammability Rating="UL94 V-0", Manufacturer="Phoenix Contact", Package Quantity=100, Supplier Part Number 1=277-11313-ND, Voltage=300V, Voltage Rating=160V, Category="Terminal Blocks", ComponentLink1Description=https://datasheet.ciiva.com/29682/5444262-29682658.pdf?src-supplier=Digi-Key, ComponentLink1URL=https://datasheet.ciiva.com/29682/5444262-29682658.pdf?src-supplier=Digi-Key, Contact Plating=Tin, Current Rating=8A, Housing Material=Polyamide, Length=9.2mm, Manufacturer Part Number=5444262, Mount="Through Hole", Number of Levels=1, Number of Positions=2, Number of Positions Per Level=2, Packaging=Bulk, Pitch=0.15inch, Pricing 1="1=0,87000, 10=0,83600, 50=0,81320, 100=0,76000, 250=0,69920, 500=0,64600, 1000=0,61560, 2500=0,60648 (USD)", RoHS=Yes, RoHS Compliant=Yes, Stock 1=66186, Supplier 1=Digi-Key, Supplier 2=Mouser, Supplier Part Number 2=651-5444262, Termination=Solder
L1: "FIXED IND 4.7UH 4A 23 MOHM SMD", Case/Package=Nonstandard, Current Rating=4.5A, DC Resistance (DCR)=27.6mR, Inductance Tolerance=20%, Manufacturer=Murata, Manufacturer Part Number=1255AY-4R7M=P3, Max DC Current=4A, Max Operating Temperature=85°C, Min Operating Temperature=-40°C, Supplier Part Number=490-10812-1-ND, Test Frequency=100kHz, Category="Fixed Inductors", ComponentLink1Description=http://search.murata.co.jp/Ceramy/image/img/P02/J(E)TE243B-0037_DG6045C_reference.pdf?src-supplier=Digikey, ComponentLink1URL=http://search.murata.co.jp/Ceramy/image/img/P02/J(E)TE243B-0037_DG6045C_reference.pdf?src-supplier=Digikey, ComponentLink2Description=http://www.toko.co.jp/products/pdf/inductors/dg6045c.pdf?src-supplier=Digikey, ComponentLink2URL=http://www.toko.co.jp/products/pdf/inductors/dg6045c.pdf?src-supplier=Digikey, ComponentLink3Description=http://www.toko.co.jp/products/pdf/inductors/dg6045c.pdf?src-supplier=Avnet, ComponentLink3URL=http://www.toko.co.jp/products/pdf/inductors/dg6045c.pdf?src-supplier=Avnet, Core Material=Ferrite, ESR=27.6mR, Height=4.5mm, Height - Seated (Max)=0.177inch, Length=0.248inch, Mounting Technology="Surface Mount", Packaging="Cut Tape", Pricing="1=0,47, 10=0,368, 25=0,3324, 50=0,3082, 100=0,2855, 250=0,25812, 500=0,2391 (USD)", RMS Current (Irms)=4A, RoHS=Yes, RoHS Compliant=Yes, Saturation Current=4.5A, Series=DG6045C, Shielding=Shielded, Stock=134445, Supplier=Digikey, Supplier 1=Digikey, Supplier Part Number 1=490-10812-1-ND, Tolerance=20%, Width=0.248inch
R1 R7: "RES 100K OHM 1% 1/8W 0805", Case Code (Imperial)=0805, Case Code (Metric)=2012, Manufacturer="TE Connectivity", Max Operating Temperature=85°C, Max Power Dissipation=125mW, Min Operating Temperature=-55°C, Operating Supply Voltage=150V, Supplier Part Number=A129773CT-ND, Supplier Part Number 1=279-CRGCQ0805F100K, Temperature Coefficient=100ppm/°C, Tolerance=1%, Case/Package=0805, Category="Chip SMD Resistors", ComponentLink1Description=https://www.te.com/commerce/DocumentDelivery/DDEController?Action=srchrtrv&DocNm=1773204-3&DocType=DS&DocLang=English&src-supplier=Digikey, ComponentLink1URL=https://www.te.com/commerce/DocumentDelivery/DDEController?Action=srchrtrv&DocNm=1773204-3&DocType=DS&DocLang=English&src-supplier=Digikey, ComponentLink2Description=https://www.te.com/commerce/DocumentDelivery/DDEController?Action=srchrtrv&amp;DocNm=1773204-3&amp;DocType=DS&amp;DocLang=English&src-supplier=Digikey, ComponentLink2URL=https://www.te.com/commerce/DocumentDelivery/DDEController?Action=srchrtrv&amp;DocNm=1773204-3&amp;DocType=DS&amp;DocLang=English&src-supplier=Digikey, ComponentLink3Description=https://4donline.ihs.com/images/VipMasterIC/IC/TYEL/TYEL-S-A0004929575/TYEL-S-A0004929575-1.pdf?hkey=52A5661711E402568146F3353EA87419&src-supplier=Farnell, ComponentLink3URL=https://4donline.ihs.com/images/VipMasterIC/IC/TYEL/TYEL-S-A0004929575/TYEL-S-A0004929575-1.pdf?hkey=52A5661711E402568146F3353EA87419&src-supplier=Farnell, ComponentLink4Description=https://datasheet.octopart.com/CRGCQ0805F100K-TE-Connectivity-datasheet-114679081.pdf?src-supplier=Master+Electronics, ComponentLink4URL=https://datasheet.octopart.com/CRGCQ0805F100K-TE-Connectivity-datasheet-114679081.pdf?src-supplier=Master+Electronics, Core Architecture=ARM, Features="Moisture Resistant,Automotive AEC-Q200", Height=650um, Interface=I2C,SPI,IrDA,UART,USART, Manufacturer Part Number=CRGCQ0805F100K, Memory Format=FLASH, Memory Size=64KB, Number of I/Os=47, Number of Terminations=2, Oscillator Type=Internal, Packaging="Cut Tape", Peripherals="Brown-out Detect/Reset,POR,PWM,WDT,DMA", Power Rating=125mW, Pricing="1=0,1, 10=0,033, 50=0,0212, 100=0,0177, 500=0,01228, 1000=0,01063 (USD)", RoHS=Yes, RoHS Compliant=Yes, Series=CRGCQ, Stock=241081, Supplier=Digikey, Supplier 1=Mouser, Supplier 2=Digikey, Supplier Part Number 2=A129773CT-ND, Voltage Rating=150V, Voltage Rating (DC)=150V
R2 R6 R10 R14 R15: "RES 470 OHM 5% 1/8W 0805", Case Code (Imperial)=0805, Case Code (Metric)=2012, Manufacturer="TE Connectivity", Max Operating Temperature=155°C, Max Power Dissipation=125mW, Min Operating Temperature=-55°C, Operating Supply Voltage=150V, Ratings=AEC-Q200, Supplier Part Number=A130132CT-ND, Supplier Part Number 1=279-CRGCQ0805J470R, Temperature Coefficient=100ppm/°C, Tolerance=5%, Case/Package=0805, Category="Chip SMD Resistors", ComponentLink1Description=http://datasheet.octopart.com/CRGCQ0805J470R-TE-Connectivity-datasheet-114679081.pdf?src-supplier=Digikey, ComponentLink1URL=http://datasheet.octopart.com/CRGCQ0805J470R-TE-Connectivity-datasheet-114679081.pdf?src-supplier=Digikey, ComponentLink2Description=http://datasheet.octopart.com/CRGCQ0805J470R-TE-Connectivity-datasheet-114679081.pdf?src-supplier=Farnell, ComponentLink2URL=http://datasheet.octopart.com/CRGCQ0805J470R-TE-Connectivity-datasheet-114679081.pdf?src-supplier=Farnell, ComponentLink3Description=http://datasheet.octopart.com/CRGCQ0805J470R-TE-Connectivity-datasheet-114679081.pdf?src-supplier=Avnet, ComponentLink3URL=http://datasheet.octopart.com/CRGCQ0805J470R-TE-Connectivity-datasheet-114679081.pdf?src-supplier=Avnet, ComponentLink4Description=http://datasheet.octopart.com/CRGCQ0805J470R-TE-Connectivity-datasheet-114679081.pdf?src-supplier=Mouser, ComponentLink4URL=http://datasheet.octopart.com/CRGCQ0805J470R-TE-Connectivity-datasheet-114679081.pdf?src-supplier=Mouser, ComponentLink5Description=http://datasheet.octopart.com/CRGCQ0805J470R-TE-Connectivity-datasheet-114679081.pdf?src-supplier=Newark, ComponentLink5URL=http://datasheet.octopart.com/CRGCQ0805J470R-TE-Connectivity-datasheet-114679081.pdf?src-supplier=Newark, ComponentLink6Description=http://datasheet.octopart.com/CRGCQ0805J470R-TE-Connectivity-datasheet-114679081.pdf?src-supplier=Onlinecomponents.com, ComponentLink6URL=http://datasheet.octopart.com/CRGCQ0805J470R-TE-Connectivity-datasheet-114679081.pdf?src-supplier=Onlinecomponents.com, ComponentLink7Description=https://datasheet.octopart.com/CRGCQ0805J470R-TE-Connectivity-datasheet-114679081.pdf?src-supplier=Master+Electronics, ComponentLink7URL=https://datasheet.octopart.com/CRGCQ0805J470R-TE-Connectivity-datasheet-114679081.pdf?src-supplier=Master+Electronics, ComponentLink8Description=http://datasheet.octopart.com/CRGCQ0805J470R-TE-Connectivity-datasheet-114679081.pdf?src-supplier=Heilind+Electronics, ComponentLink8URL=http://datasheet.octopart.com/CRGCQ0805J470R-TE-Connectivity-datasheet-114679081.pdf?src-supplier=Heilind+Electronics, ComponentLink9Description=http://datasheet.octopart.com/CRGCQ0805J470R-TE-Connectivity-datasheet-114679081.pdf?src-supplier=Sager+Electronics, ComponentLink9URL=http://datasheet.octopart.com/CRGCQ0805J470R-TE-Connectivity-datasheet-114679081.pdf?src-supplier=Sager+Electronics, ComponentLink10Description=http://datasheet.octopart.com/CRGCQ0805J470R-TE-Connectivity-datasheet-114679081.pdf?src-supplier=Interstate+Connecting+Components, ComponentLink10URL=http://datasheet.octopart.com/CRGCQ0805J470R-TE-Connectivity-datasheet-114679081.pdf?src-supplier=Interstate+Connecting+Components, ComponentLink11Description=http://datasheet.octopart.com/CRGCQ0805J470R-TE-Connectivity-datasheet-114679081.pdf?src-supplier=Electro+Sonic, ComponentLink11URL=http://datasheet.octopart.com/CRGCQ0805J470R-TE-Connectivity-datasheet-114679081.pdf?src-supplier=Electro+Sonic, Features="Moisture Resistant,Automotive AEC-Q200", Height=650um, Manufacturer Part Number=CRGCQ0805J470R, Number of Terminations=2, Packaging="Cut Tape", Power Rating=125mW, Pricing="1=0,1, 10=0,026, 50=0,0162, 100=0,0137, 500=0,00942, 1000=0,00813 (USD)", RoHS=Yes, RoHS Compliant=Yes, Series=CRGCQ, Stock=837845, Supplier=Digikey, Supplier 1=Mouser, Supplier 2=Digikey, Supplier Part Number 2=A130132CT-ND, Voltage Rating=150V, Voltage Rating (DC)=150V
R3 R8 R16: "RES 10K OHM 1% 1/8W 0805", Case Code (Imperial)=0805, Case Code (Metric)=2012, Manufacturer=Yageo, Max Operating Temperature=155°C, Max Power Dissipation=125mW, Min Operating Temperature=-55°C, Package Quantity=1, Resistance Tolerance=1%, Resistor Type="Thick Film", Supplier Part Number=311-10.0KCRCT-ND, Temperature Coefficient=100ppm/°C, Voltage Rating=150V, Case/Package=0805, Category="Chip SMD Resistors", Construction=Rectangular, Depth=1.25mm, Features="Moisture Resistant", Height=0.024inch, Lead Free="Lead Free", Length=0.079inch, Manufacturer Part Number=RC0805FR-0710KL, Military Standard=Not, Number of Terminations=2, Packaging="Tape and Reel", Power Rating=125mW, Pricing="1=0,1, 10=0,027, 50=0,017, 100=0,0142, 500=0,00976, 1000=0,00844 (USD)", Reach SVHC Compliant=Unknown, RoHS=Yes, RoHS Compliant=Yes, Series=RC, Stock=2107948, Supplier=Digikey, Supplier 1=Digikey, Supplier 2=Mouser, Supplier 3=Digikey, Supplier Part Number 1=311-10.0KCRCT-ND, Supplier Part Number 2=603-RC0805FR-0710KL, Supplier Part Number 3=541-3976-1-ND, Technology="THICK FILM", Termination=SMD/SMT, Tolerance=1%, Voltage Rating (AC)=150V, Width=0.049inch
R4: "RES 1K OHM 1% 1/8W 0805", Case Code (Imperial)=0805, Case Code (Metric)=2012, Manufacturer=Yageo, Max Operating Temperature=155°C, Max Power Dissipation=125mW, Min Operating Temperature=-55°C, Package Quantity=1, Resistance Tolerance=1%, Resistor Type="Thick Film", Supplier Part Number=311-1.00KCRCT-ND, Temperature Coefficient=100ppm/°C, Voltage Rating=150V, Case/Package=0805, Category="Chip SMD Resistors", ComponentLink1Description=https://datasheet.ciiva.com/2456/pyu-r-int-thick-7-2456975.pdf?src-supplier=Digikey, ComponentLink1URL=https://datasheet.ciiva.com/2456/pyu-r-int-thick-7-2456975.pdf?src-supplier=Digikey, ComponentLink2Description=https://datasheet.ciiva.com/2456/pyu-r-int-thick-7-2456976.pdf?src-supplier=Digikey, ComponentLink2URL=https://datasheet.ciiva.com/2456/pyu-r-int-thick-7-2456976.pdf?src-supplier=Digikey, ComponentLink3Description=https://datasheet.ciiva.com/2456/pyu-r-int-thick-7-2456977.pdf?src-supplier=Digikey, ComponentLink3URL=https://datasheet.ciiva.com/2456/pyu-r-int-thick-7-2456977.pdf?src-supplier=Digikey, ComponentLink4Description=https://datasheet.ciiva.com/16850/rc0805-16850409.pdf?src-supplier=Future+Electronics, ComponentLink4URL=https://datasheet.ciiva.com/16850/rc0805-16850409.pdf?src-supplier=Future+Electronics, ComponentLink5Description=https://datasheet.ciiva.com/46385/444164-46385020.pdf?src-supplier=Element14, ComponentLink5URL=https://datasheet.ciiva.com/46385/444164-46385020.pdf?src-supplier=Element14, ComponentLink6Description=https://datasheet.ciiva.com/7941/1686128-7941719.pdf?src-supplier=Element14, ComponentLink6URL=https://datasheet.ciiva.com/7941/1686128-7941719.pdf?src-supplier=Element14, Construction=Rectangular, Depth=1.25mm, Features="Moisture Resistant", Height=0.024inch, Lead Free="Lead Free", Length=0.079inch, Manufacturer Part Number=RC0805FR-071KL, Military Standard=Not, Number of Terminations=2, Packaging="Tape and Reel", Pins=2, Power Rating=125mW, Pricing="1=0,1, 10=0,025, 50=0,016, 100=0,0133, 500=0,00912, 1000=0,00787 (USD)", Reach SVHC Compliant=No, RoHS=Yes, RoHS Compliant=Yes, Series=RC, Stock=2276979, Supplier=Digikey, Supplier 1=Digikey, Supplier 2=Mouser, Supplier Part Number 1=311-1.00KCRCT-ND, Supplier Part Number 2=603-RC0805FR-071KL, Termination=SMD/SMT, Tolerance=1%, Voltage Rating (AC)=150V, Voltage Rating (DC)=150V, Width=0.049inch
R5: "RES SMD 2K OHM 1% 1/8W 0805", Case Code (Imperial)=0805, Case Code (Metric)=2012, Manufacturer=Panasonic, Max Operating Temperature=155°C, Max Power Dissipation=125mW, Min Operating Temperature=-55°C, Package Quantity=1, Resistance Tolerance=1%, Resistor Type="Thick Film", Supplier Part Number=P2.00KCCT-ND, Supplier Part Number 1=667-ERJ-6ENF2001V, Temperature Coefficient=100ppm/°C, Voltage Rating=150V, Case/Package=0805, Category="Chip SMD Resistors", Construction=Rectangular, Contact Plating=Tin, Depth=1.25mm, Features="Automotive AEC-Q200", Height=0.6mm, Lead Free="Lead Free", Length=2mm, Manufacturer Part Number=ERJ-6ENF2001V, Military Standard=Not, Mounting Technology="Surface Mount", Number of Terminations=2, Packaging="Tape and Reel", Power Rating=125mW, Pricing="1=0,11, 10=0,053, 50=0,0344, 100=0,0292, 500=0,02058, 1000=0,01792 (USD)", Radiation Hardening=No, Reach SVHC Compliant=No, RoHS=Yes, RoHS Compliant=Yes, Series=ERJ, Stock=369929, Supplier=Digikey, Supplier 1=Mouser, Supplier 2=Digikey, Supplier 3=Digikey, Supplier Part Number 2=P2.00KCCT-ND, Supplier Part Number 3=P2.00KCCT-ND, Technology="THICK FILM", Termination=SMD/SMT, Tolerance=1%, Voltage Rating (DC)=150V, Weight=0.000194oz, Width=1.2mm
R9: "RES 1M OHM 1% 1/8W 0805", Case Code (Imperial)=0805, Case Code (Metric)=2012, Case/Package=Molded, Manufacturer=Yageo, Max Operating Temperature=155°C, Min Operating Temperature=-55°C, Power Rating=125mW, Resistance Tolerance=1%, Resistor Type="Thick Film", Supplier Part Number=311-1.00MCRCT-ND, Temperature Coefficient=250ppm/°C, Voltage Rating=150V, Category="Chip SMD Resistors", ComponentLink1Description=https://datasheet.ciiva.com/17419/rc0805-17419909.pdf?src-supplier=Future+Electronics, ComponentLink1URL=https://datasheet.ciiva.com/17419/rc0805-17419909.pdf?src-supplier=Future+Electronics, Construction=Rectangular, Depth=1.25mm, Lead Free="Lead Free", Length=2mm, Manufacturer Part Number=RC0805FR-071ML, Military Standard=Not, Packaging="Tape and Reel", Pricing="1=0,1, 10=0,026, 50=0,0162, 100=0,0134, 500=0,00906, 1000=0,00778 (USD)", Reach SVHC Compliant=Unknown, RoHS=Yes, RoHS Compliant=Yes, Stock=145027, Supplier=Digikey, Supplier 1=Digikey, Supplier 2=Mouser, Supplier Part Number 1=311-1.00MCRCT-ND, Supplier Part Number 2=603-RC0805FR-071ML, Tolerance=1%, Voltage Rating (AC)=150V
R11: "RES 270K OHM 1% 1/8W 0805", Case Code (Imperial)=0805, Case Code (Metric)=2012, Manufacturer=Yageo, Max Operating Temperature=155°C, Max Power Dissipation=125mW, Min Operating Temperature=-55°C, Package Quantity=1, Resistance Tolerance=1%, Resistor Type="Thick Film", Supplier Part Number=311-270KCRCT-ND, Temperature Coefficient=100ppm/°C, Voltage Rating=150V, Case/Package=0805, Category="Chip SMD Resistors", ComponentLink1Description=https://datasheet.ciiva.com/11819/0900766b8106beab-11819833.pdf?src-supplier=Rs, ComponentLink1URL=https://datasheet.ciiva.com/11819/0900766b8106beab-11819833.pdf?src-supplier=Rs, ComponentLink2Description=https://datasheet.ciiva.com/2457/pyu-r-int-thick-7-2457227.pdf?src-supplier=Digikey, ComponentLink2URL=https://datasheet.ciiva.com/2457/pyu-r-int-thick-7-2457227.pdf?src-supplier=Digikey, ComponentLink3Description=https://datasheet.ciiva.com/2457/pyu-r-int-thick-7-2457228.pdf?src-supplier=Digikey, ComponentLink3URL=https://datasheet.ciiva.com/2457/pyu-r-int-thick-7-2457228.pdf?src-supplier=Digikey, ComponentLink4Description=https://datasheet.ciiva.com/2457/pyu-r-int-thick-7-2457229.pdf?src-supplier=Digikey, ComponentLink4URL=https://datasheet.ciiva.com/2457/pyu-r-int-thick-7-2457229.pdf?src-supplier=Digikey, ComponentLink5Description=https://datasheet.ciiva.com/5558/rc0805-5558095.pdf?src-supplier=Mouser, ComponentLink5URL=https://datasheet.ciiva.com/5558/rc0805-5558095.pdf?src-supplier=Mouser, Depth=1.25mm, Features="Moisture Resistant", Height=0.024inch, Lead Free="Lead Free", Length=0.079inch, Manufacturer Part Number=RC0805FR-07270KL, Number of Terminations=2, Packaging="Cut Tape", Power Rating=125mW, Pricing="1=0,1, 10=0,025, 50=0,016, 100=0,0133, 500=0,00912, 1000=0,00787 (USD)", Reach SVHC Compliant=Unknown, RoHS=Yes, RoHS Compliant=Yes, Series=RC, Stock=171412, Supplier=Digikey, Supplier 1=Digikey, Supplier 2=Mouser, Supplier Part Number 1=311-270KCRCT-ND, Supplier Part Number 2=603-RC0805FR-07270KL, Technology="THICK FILM", Termination=SMD/SMT, Tolerance=1%, Voltage Rating (AC)=150V, Width=0.049inch, Working Voltage=150V